# Altium PCB Mainboard.PcbDoc
Units mm, origin at the board's own origin, x right, y up, seen from the top; angles counter-clockwise.
Board outline 80 x 70 mm, 2 copper layers (Top Layer, Bottom Layer); 17 components, 19 nets, 71 pads, 0 vias.
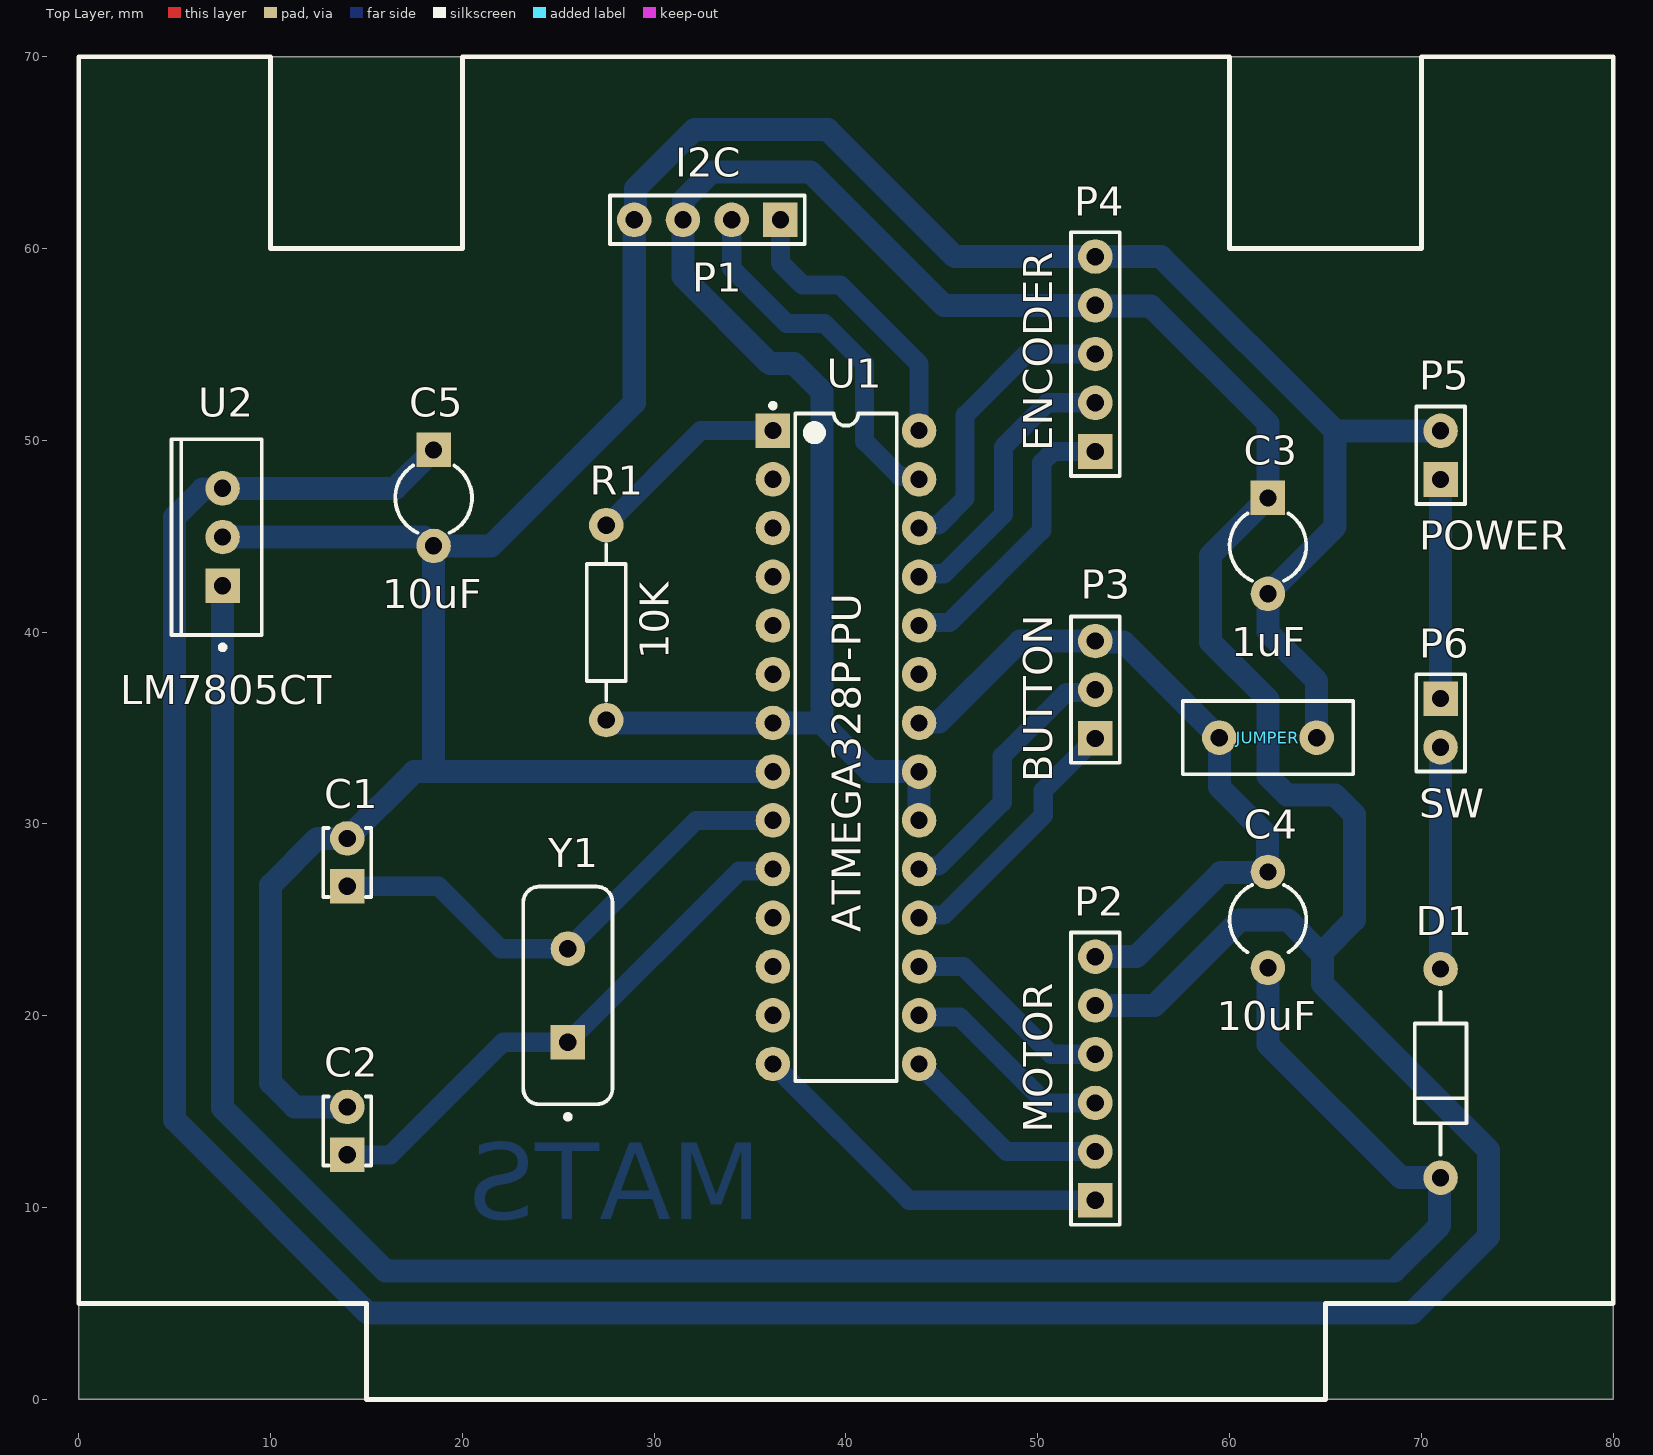
[diagram p0: Top Layer view]
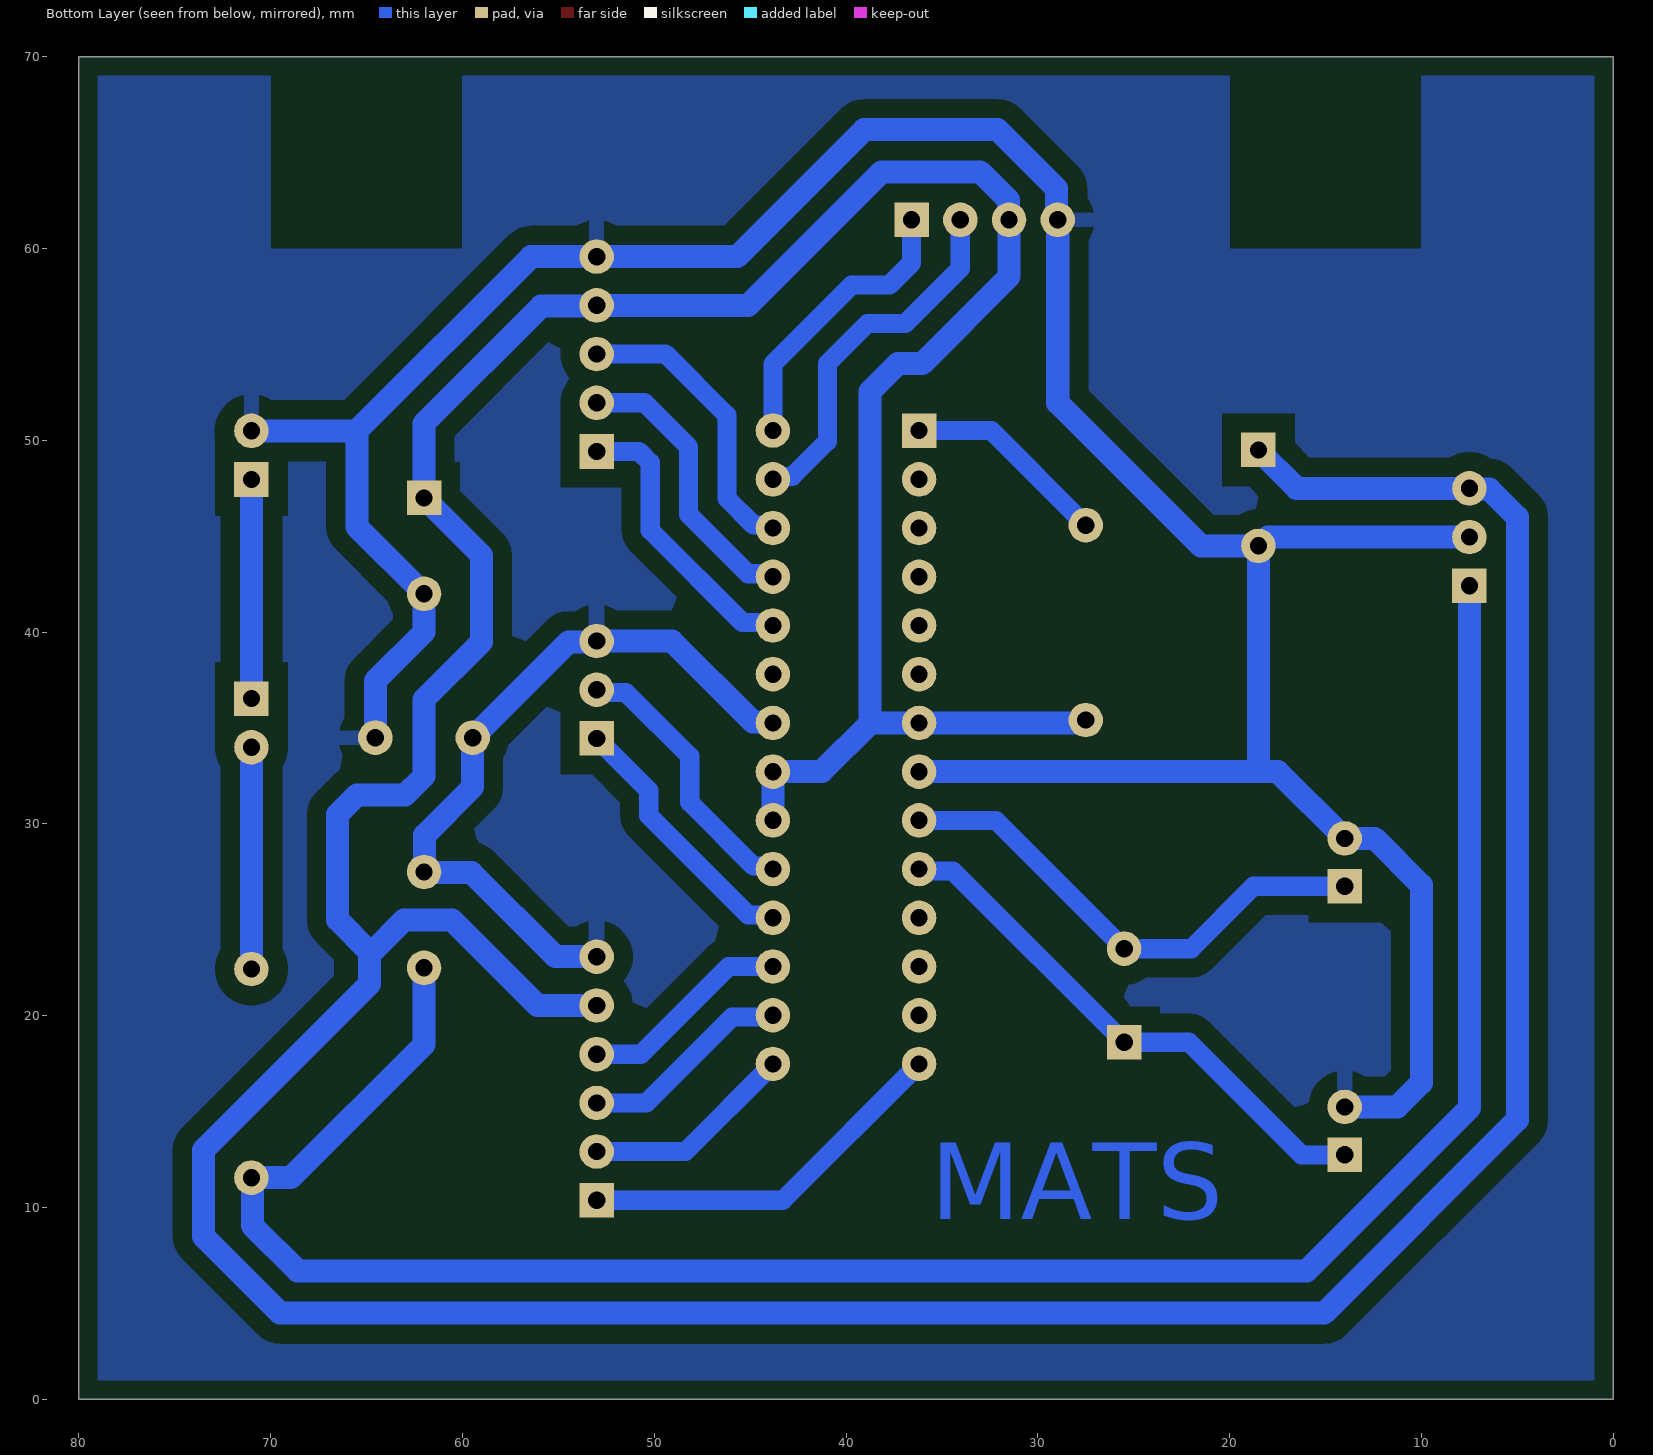
[diagram p1: Bottom Layer view, seen from below]

## Layer stack, top to bottom
Top Solder: solder mask 0.0102, Solder Resist, Dk 3.5
Top Layer: signal copper 0.0356
Dielectric 1: dielectric 0.32, FR-4, Dk 4.8
Bottom Layer: signal copper 0.0356
Bottom Solder: solder mask 0.0102, Solder Resist, Dk 3.5

## Board outline
0,0 80,0 80,70 0,70

## Design rules (kind name [scope] priority, off if disabled: settings)
Clearance [All] p1: gap=0.99 ignorepadtopadclearanceinfootprint=TRUE
ComponentClearance [All] p1: gap=3 collisioncheckmode=3 verticalgap=0.254 showdistances=FALSE
PlaneClearance [All] p1: clearance=1
PolygonConnect [All] p1: connectstyle=Relief reliefconductorwidth=0.8 reliefentries=2 polygonreliefangle="90 Angle" airgapwidth=1
RoutingLayers [All] p1: top layer_v5=FALSE bottom layer_v5=TRUE
RoutingVias [All] p1: holewidth=0.711 width=1.27 viastyle="Through Hole" minholewidth=0.711 minwidth=1.27 maxholewidth=0.711 maxwidth=1.27
SilkToSolderMaskClearance [InComponent('U1')] p1: minsilkscreentomaskgap=0.075 clearancetoexposedcopper=TRUE
SolderMaskExpansion [All] p1: expansion=0.102 istentingtop=FALSE
UnRoutedNet [All] p1: checkbadconnections=TRUE
Width Width_Other [InNetClass('Other')] p1: maxlimit=1 minlimit=1 preferedwidth=1
Width Width_Power [InNetClass('Power')] p2: maxlimit=1.2 minlimit=1.2 preferedwidth=1.2
25 further rules are at their usual default settings.

## Classes and differential pairs
net class Other: A1 A2 A3 A4 A5 D8 D9 D10 D11 D12 D13 P1 X1 X2
net class Power: 5V 12V GND "PW IN" "SW IN"
component class Mainboard: C1 C2 C3 C4 C5 D1 P1 P2 P3 P4 P5 P6 R1 U1 U2 Y1

## Components (designator, comment, footprint, x,y, rotation, side; value= is the part's Value field where it differs from the comment)
C1 "22pF" FP-RCE0DB-MFG 14,28 r90 top
C2 "22pF" FP-RCE0DB-MFG 14,14 r90 top
C3 "1uF" CAPR5-4X5#1 62,44.5 r270 top
C4 "10uF" CAPR5-4X5#2 62,25 r90 top
C5 "10uF" CAPR5-4X5#1 18.5,47 r270 top
D1 "1N4007-E3/54" FP-1N4007-MFG 71,17 r90 top value=15pF
JUMPER "Comment" RAD-0.2 62,34.5 r0 top
P1 "I2C" HDR1X4 36.58,61.5 r180 top
P2 "MOTOR" HDR1X6 53,10.38 r90 top
P3 "BUTTON" HDR1X3 53,34.46 r90 top
P4 "ENCODER" HDR1X5 53,49.42 r90 top
P5 "POWER" HDR1X2 71,47.96 r90 top
P6 "SW" HDR1X2 71,36.54 r270 top
R1 "10K" AXIAL-0.4 27.5,40.5 r90 top
U1 "ATMEGA328P-PU" ATML-28P3 40,34 r0 top
U2 "LM7805CT" FAIR-TO-220-3 7.5,44.96 r180 top
Y1 "16MHz" FOX-FOXSLF160-20 25.5,21.06 r90 top

## Footprints (in the part's own frame and the unit in brackets; to place one, negate y for a bottom-side part, rotate by r counter-clockwise, add the part's x,y. Pads: shape width x height; smd on the part's side, far side on the other; paste and mask are expansions set on the pad)
ATML-28P3 [mm] "DIP, 28-Leads, Body 34.8x7.2mm, Pitch 2.54mm"
  rect 1.8x1.8 hole 0.9: 1(-3.81,16.51)
  round 1.8 hole 0.9: 2(-3.81,13.97) 3(-3.81,11.43) 4(-3.81,8.89) 5(-3.81,6.35) 6(-3.81,3.81) 7(-3.81,1.27) 8(-3.81,-1.27) 9(-3.81,-3.81) 10(-3.81,-6.35) 11(-3.81,-8.89) 12(-3.81,-11.43) 13(-3.81,-13.97) 14(-3.81,-16.51) 15(3.81,-16.51) 16(3.81,-13.97) 17(3.81,-11.43) 18(3.81,-8.89) 19(3.81,-6.35) 20(3.81,-3.81) 21(3.81,-1.27) 22(3.81,1.27) 23(3.81,3.81) 24(3.81,6.35) 25(3.81,8.89) 26(3.81,11.43) 27(3.81,13.97) 28(3.81,16.51)
  silkscreen extent -3.93,-17.4 2.65,17.93, body extent -3.95,-17.4 3.95,17.4, height 4.58
AXIAL-0.4 [mm] "Axial Device, Thru-Hole; 2 Leads; 0.4 in Pin Spacing"
  round 1.8 hole 0.9: 1(-5.08,0) 2(5.08,0)
  silkscreen extent -4.06,-1.02 4.06,1.02
CAPR5-4X5#1 [mm] "Capacitor; 2 Leads"
  rect 1.8x1.8 hole 0.9: 1(-2.5,0)
  round 1.8 hole 0.9: 2(2.5,0)
  silkscreen extent -1.69,-2 1.82,2
CAPR5-4X5#2 [mm] "Capacitor; 2 Leads"
  round 1.8 hole 0.9: 1(-2.5,0) 2(2.5,0)
  silkscreen extent -1.69,-2 1.82,2
FAIR-TO-220-3 [mm] "FM, 3-Leads, Body 10.2x4.7mm, Pitch 2.54mm"
  rect 1.8x1.8 hole 0.9: 1(0,2.54)
  round 1.8 hole 0.9: 2(0,0) 3(0,-2.54)
  silkscreen extent -2.04,-5.1 2.66,5.87, body extent -2.04,-5.1 2.66,5.1, height 18.95
FOX-FOXSLF160-20 [mm] "THD, 2-Leads, Body 11.35x4.65mm"
  rect 1.8x1.8 hole 0.9: 1(-2.44,0)
  round 1.8 hole 0.9: 2(2.44,0)
  silkscreen extent -6.45,-2.33 5.68,2.33, body extent -5.67,-2.32 5.68,2.33, height 3.6
FP-1N4007-MFG [mm]
  round 1.8 hole 0.9 paste-1000 mask+0: 1(-5.438,0) 2(5.438,0)
  silkscreen extent -4.24,-1.35 4.24,1.35, body extent -5.96,-1.34 5.96,1.34, height 2.7
FP-RCE0DB-MFG [mm]
  rect 1.8x1.8 hole 0.9 paste-1000 mask+0: 1(-1.25,0)
  round 1.8 hole 0.9 paste-1000 mask+0: 2(1.25,0)
  silkscreen extent -1.8,-1.25 1.8,1.25, body extent -1.8,-1.25 1.8,1.25, height 5
HDR1X2 [mm] "Connector; Header; 2 Position"
  rect 1.8x1.8 hole 0.9: 1(0,0)
  round 1.8 hole 0.9: 2(2.54,0)
  silkscreen extent -1.27,-1.27 3.81,1.27
HDR1X3 [mm] "Connector; Header; 3 Position"
  rect 1.8x1.8 hole 0.9: 1(0,0)
  round 1.8 hole 0.9: 2(2.54,0) 3(5.08,0)
  silkscreen extent -1.27,-1.27 6.35,1.27
HDR1X4 [mm] "Connector; Header; 4 Position"
  rect 1.8x1.8 hole 0.9: 1(0,0)
  round 1.8 hole 0.9: 2(2.54,0) 3(5.08,0) 4(7.62,0)
  silkscreen extent -1.27,-1.27 8.89,1.27
HDR1X5 [mm] "Connector; Header; 5 Position"
  rect 1.8x1.8 hole 0.9: 1(0,0)
  round 1.8 hole 0.9: 2(2.54,0) 3(5.08,0) 4(7.62,0) 5(10.16,0)
  silkscreen extent -1.27,-1.27 11.43,1.27
HDR1X6 [mm] "Connector; Header; 6 Position"
  rect 1.8x1.8 hole 0.9: 1(0,0)
  round 1.8 hole 0.9: 2(2.54,0) 3(5.08,0) 4(7.62,0) 5(10.16,0) 6(12.7,0)
  silkscreen extent -1.27,-1.27 13.97,1.27
RAD-0.2 [mm] "Radial Cap, Thru-Hole; 2 Leads; 0.2 in Pin Spacing"
  round 1.8 hole 0.9: 1(-2.54,0) 2(2.54,0)
  silkscreen extent -4.44,-1.91 4.44,1.91

## Part data
C1 C2: library part CMP-06035-057691-1, "Cap Ceramic 22pF 50V C0G ±5% Radial 2.5mm +125°C Ammo Pack", Case/Package=Radial, Dielectric=C0G, Max Operating Temperature=125°C, Min Operating Temperature=-55°C, Package Quantity=2000, Ratings=AEC-Q200, Resistor Type=Ceramic, Tolerance=5%, Voltage Rating=50V, Capacitance=22pF, Height=3.5mm, Height - Seated (Max)=0.138inch, Lead Diameter=0.5mm, Lead Pitch=0.098inch, Lead/Base Style=Straight, Length=0.142inch, Mount="Through Hole", Packaging="Tape and Reel", Termination=Radial, Voltage Rating (DC)=50V, Width=0.098inch
C3 C4 C5: library part Cap2, "Capacitor", PackageDescription="Capacitor; 2 Leads", PackageReference=CAPR5-4X5, Published=23-Sep-2002, Publisher="Altium Limited"
D1: library part CMP-02540-000046-1, "DIODE GEN PURP 1KV 1A DO204AL", Capacitance=15pF, Forward Current=1A, Manufacturer=Vishay, Max Junction Temp=+150°C, Max Repetitive Reverse Voltage=1000V, Max Surge Forward Current=30A, Package=1N4007, Peak Reverse Current=30uA, Temperature="-50°C to +150°C", Temperature Range Low=-50°C, Automotive=No, Category=Diode, ComponentLink2Description=Datasheet, ComponentLink2URL=http://www.vishay.com/docs/88503/1n4001.pdf, Device Class L1="Discrete Semiconductors", Device Class L2=Diodes, Device Class L3="Rectifier Diodes", Digikey Description="DIODE GEN PURP 1KV 1A DO204AL", Height=2.7mm, Ipc Land Pattern Name=DIOPA1088W105L520D270, Lead Free=Yes, Manufacturer Part Number=1N4007-E3/54, Mouser Description="Rectifiers Vr/1000V Io/1A", Octopart=https://octopart.com/1n4007-e3%2F54-vishay-39548207, RoHS=TRUE, Temperature Range High=+150°C
P1: library part "Header 4", "Header, 4-Pin", LatestRevisionDate=17-Jul-2002, LatestRevisionNote="Re-released for DXP Platform.", Publisher="Altium Limited"
P2: library part "Header 6", "Header, 6-Pin", LatestRevisionDate=17-Jul-2002, LatestRevisionNote="Re-released for DXP Platform.", Publisher="Altium Limited"
P3: library part "Header 3", "Header, 3-Pin", LatestRevisionDate=17-Jul-2002, LatestRevisionNote="Re-released for DXP Platform.", Publisher="Altium Limited"
P4: library part "Header 5", "Header, 5-Pin", LatestRevisionDate=17-Jul-2002, LatestRevisionNote="Re-released for DXP Platform.", Publisher="Altium Limited"
P5 P6: library part "Header 2", "Header, 2-Pin", LatestRevisionDate=17-Jul-2002, LatestRevisionNote="Re-released for DXP Platform.", Publisher="Altium Limited"
R1: library part Res2, "Resistor", LatestRevisionDate=17-Jul-2002, LatestRevisionNote="Re-released for DXP Platform.", PackageDescription="Axial Device, Thru-Hole; 2 Leads; 0.4 in Pin Spacing", PackageReference=AXIAL-0.4, Published=8-Jun-2000, Publisher="Altium Limited"
U1: library part CMP-020-00004-3, "8-Bit Microcontroller with 32 KBytes In-System Programmable Flash, 23 I/Os, -40 to 85 degC, 28-Pin PDIP (28P3), RoHS, Tube", Case/Package=DIP, Manufacturer=Atmel, Max Clock Frequency=20MHz, Max Operating Temperature=85°C, Max Supply Voltage=5.5V, Min Operating Temperature=-40°C, Min Supply Voltage=1.8V, Package Description="28-Pin Plastic Dual Inline Package, Body 34.671 x 7.3025 mm, Pitch 2.54 mm", Package Quantity=14, Package Reference=28P3, Package Version="Rev. B, 09/2001", Datasheet URL=http://www.atmel.com/images/Atmel-8271-8-bit-AVR-Microcontroller-ATmega48A-48PA-88A-88PA-168A-168PA-328-328P_datasheet_Complete.pdf, Datasheet Version="Rev. 8271J, 11/2015", Density=32KB, Ethernet Channels=0, I/Os=23, Interface=USART, Manufacturer URL=http://www.atmel.com/, Mounting Technology=TH, Package URL=http://www.atmel.com/images/Atmel-8271-8-bit-AVR-Microcontroller-ATmega48A-48PA-88A-88PA-168A-168PA-328-328P_datasheet_Complete.pdf, Packaging=Rail/Tube, Pins=28, RAM Size=2KB, RoHS Compliant=True
U2: library part CMP-2000-04938-1, "Positive Voltage Regulator, 5 V, 1 A, -40 to 125 degC, 3-Pin TO-220, RoHS, Tube", Manufacturer=FairchildSemiconductor, Maximum Input Voltage=35V, Maximum Output Current=2.2(Typ)A, Maximum Quiescent Current=8mA, Operating Temperature=-40to125degC, Output Voltage=5V, Package=3TO-220AB, Package Description="3-Pin Through Hole Device, Body 10 x 4.5 mm, Pitch 2.54 mm", Package Reference=TO-220, Typical Dropout Voltage @ Current=2@1AV, Accuracy=±4%, Category=LinearRegulator, Datasheet URL=https://datasheet.ciiva.com/26904/lm7805ct-26904988.pdf, Datasheet Version=Aug-12, Line Regulation=100mV, Load Regulation=100mV, Manufacturer URL=https://www.fairchildsemi.com/, Mounting=ThroughHole, Number of Outputs=1, Output Type=Fixed, Package URL=https://www.fairchildsemi.com/package-drawings/TO/TO220B03.pdf, Packaging=Rail/Tube, Polarity=Positive, Rad Hard=No, Type=Linear
Y1: library part CMP-1749-00003-1, "Resistance Weld Thru-Hole Crystal, 16 MHz, -20 to 70 degC, 2-Pin THD, RoHS, Bulk", Case\Package=Axial, Max Operating Temperature="155 degC", Min Operating Temperature="-55 degC", Package Quantity=200, Power Rating="250 mW", Resistance="221 kohm", Tolerance=1%, Voltage Rating="250 V", ComponentLink1Description="Manufacturer URL", ComponentLink1URL=http://www.foxonline.com/, ComponentLink2Description=Datasheet, ComponentLink2URL=http://www.foxonline.com/pdfs/hc49slf.pdf, DatasheetVersion=Mar-15, Length="0.248 inch", Mount="Through Hole", PackageDescription="2-Pin Through Hole Device, Body 11.35 x 4.65 mm", PackageReference=FOXSLF160-20, Packaging=Bulk, RoHSCompliant=true

## Nets (pads, with @x,y where several pads share a name; then routed paths per layer and width w, separated by ;. In a path a pad name is that pad's centre, name@x,y a point inside that pad or via, vN(x,y) a via of type N, cw(c..) or ccw(c..) an arc to the next point about the centre after c; other vN are vias at no path point)
5V: C3.1 C5.1 P1.3 P2.5 P4.4 R1.1 U1.7 U1.20 U1.21 U2.3 | length 275
  Bottom Layer w1.2: C5.1 16.5,47.5 U2.3 7.46,47.46 6.464,47.46 5,45.996 5,14.576 15.076,4.5 69.5,4.5 73.5,8.5 73.5,13 64.85,21.65 64.85,23.35 ; R1.1 27.554,35.42 27.704,35.27 U1.7 36.2,35.26 38.74,35.26 ; U1.20 U1.21 43.8,32.74 41.26,32.74 38.74,35.26 ; P2.5 56.092,20.54 60.552,25 60.964,25 63.036,25 64.686,23.35 64.85,23.35 ; 38.74,35.26 38.74,52.557 37.297,54 36.032,54 31.5,58.532 P1.3 31.54,61.54 31.54,62.536 33.004,64 38.143,64 45.098,57.045 45.098,57.04 P4.4 53.04,57 55.889,57 62,50.889 C3.1 59,44 59,39.5 62,36.5 62,32.5 63,31.5 65.5,31.5 66.5,30.5 66.5,25 64.85,23.35
12V: C4.1 D1.1 U2.1 | length 113.6
  Bottom Layer w1.2: U2.1 7.5,15.187 15.987,6.7 68.589,6.7 70.944,9.056 70.944,11.506 D1.1 68.938,11.562 62,18.5 62,20 C4.1
A1: P4.1 U1.24 | length 15
  Bottom Layer w1: U1.24 44.026,40.35 44.18,40.503 45.394,40.503 50.21,45.319 50.21,48.834 50.796,49.42 P4.1
A2: P4.2 U1.25 | length 15
  Bottom Layer w1: U1.25 44.026,42.89 44.18,43.043 45.106,43.043 48.21,46.147 48.21,49.663 50.507,51.96 P4.2
A3: P4.3 U1.26 | length 15.5
  Bottom Layer w1: U1.26 43.963,45.583 44.817,45.583 46.21,46.976 46.21,51.307 49.403,54.5 P4.3
A4: P1.2 U1.27 | length 19.2
  Bottom Layer w1: P1.2 34.04,58.962 36.902,56.1 38.87,56.1 40.971,53.999 40.971,49.955 42.803,48.123 43.657,48.123 U1.27
A5: P1.1 U1.28 | length 15.1
  Bottom Layer w1: P1.1 36.58,59.25 37.73,58.1 39.698,58.1 43.81,53.988 U1.28
D8: P2.1 U1.14 | length 19.8
  Bottom Layer w1: U1.14 43.3,10.38 P2.1
D9: P2.2 U1.15 | length 11.1
  Bottom Layer w1: U1.15 48.38,12.92 P2.2
D10: P2.3 U1.16 | length 11.1
  Bottom Layer w1: U1.16 43.906,19.934 45.927,19.934 50.402,15.46 P2.3
D11: P2.4 U1.17 | length 11.1
  Bottom Layer w1: U1.17 46.12,22.57 50.69,18 P2.4
D12: P3.1 U1.18 | length 13.8
  Bottom Layer w1: U1.18 44.026,25.11 44.18,25.263 45.106,25.263 50.282,30.44 50.282,31.742 P3.1
D13: P3.2 U1.19 | length 14.5
  Bottom Layer w1: U1.19 43.963,27.803 44.817,27.803 48.148,31.134 48.148,33.529 51.479,36.86 52.86,36.86 P3.2
GND: C1.2 C2.2 C3.2 C4.2 C5.2 JUMPER.1 JUMPER.2 P1.4 P2.6 P3.3 P4.5 P5.2 U1.8 U1.22 U2.2 | length 197.8
  Bottom Layer w1.2: U2.2 17.999,44.96 18.459,44.5 C5.2 ; C2.2 11.25,15.25 10,16.5 10,26.813 12.437,29.25 C1.2 17.48,32.73 18.5,32.73 ; U1.8 18.5,32.73 ; U1.22 43.85,35.31 44.846,35.31 49.076,39.54 P3.3 53.04,39.5 54.46,39.5 JUMPER.1 59.46,31.929 61.971,29.417 61.971,27.529 C4.2 61.971,27.471 59.531,27.471 55.139,23.08 P2.6 ; JUMPER.2 64.54,37.46 62,40 C3.2 65.5,45.5 65.5,50.5 ; P5.2 65.5,50.5 ; 18.5,32.73 C5.2 ; C5.2 21.5,44.5 28.96,51.96 28.96,61.72 29.017,61.777 29.017,63.124 32.093,66.2 39.054,66.2 45.674,59.58 P4.5 56.42,59.58 65.5,50.5
P1: R1.2 U1.1 | length 10.7
  Bottom Layer w1: R1.2 32.43,50.51 U1.1
"PW IN": P5.1 P6.1 | length 11.4
  Bottom Layer w1.2: P6.1 P5.1
"SW IN": D1.2 P6.2 | length 11.6
  Bottom Layer w1.2: D1.2 P6.2
X1: C1.1 U1.9 Y1.2 | length 26.3
  Bottom Layer w1: C1.1 18.75,26.75 22,23.5 Y1.2 32.19,30.19 U1.9
X2: C2.1 U1.10 Y1.1 | length 28.4
  Bottom Layer w1: C2.1 16.25,12.75 22.12,18.62 Y1.1 34.434,27.554 36.094,27.554 U1.10
pads on no net: U1.2 U1.3 U1.4 U1.5 U1.6 U1.11 U1.12 U1.13 U1.23

## Polygon pours and split planes (outlines as drawn)
GND on Bottom Layer "GND_L02_P000" (solid, remove dead copper, pour order 0): 1,1 1,69 10,69 10,60 20,60 20,69 60,69 60,60 70,60 70,69 79,69 79,1

## Other copper
Bottom Layer:
  text "MATS" at 35.6,9.4 h4

## Silkscreen, mask and mechanical layers (free items; w line width, h text height)
Top Overlay:
  lines w0.254: 0,5 0,70 10,70 10,60 20,60 20,70 60,70 60,60 70,60 70,70 80,70 80,5 65,5 65,0 15,0 15,5 0,5